# Altium PCB Sensor_Borad_V0.PcbDoc
Units mm, origin at the board's own origin, x right, y up, seen from the top; angles counter-clockwise.
Board outline 27 x 10.68 mm, 2 copper layers (Top Layer, Bottom Layer), stack 0.982 mm thick; 10 components, 7 nets, 40 pads, 15 vias.
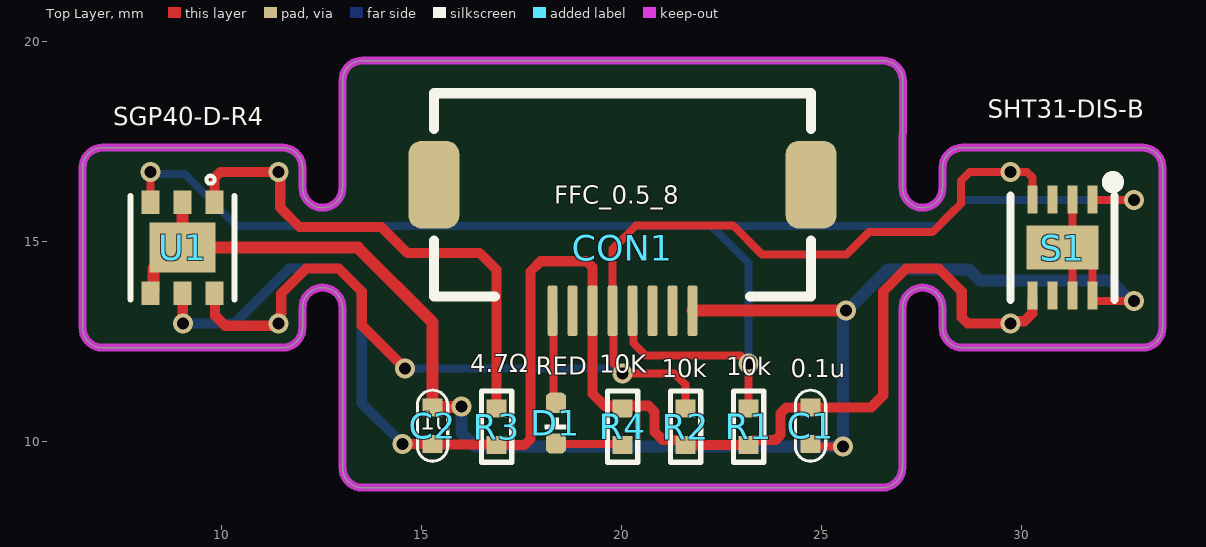
[diagram p0: Top Layer view]
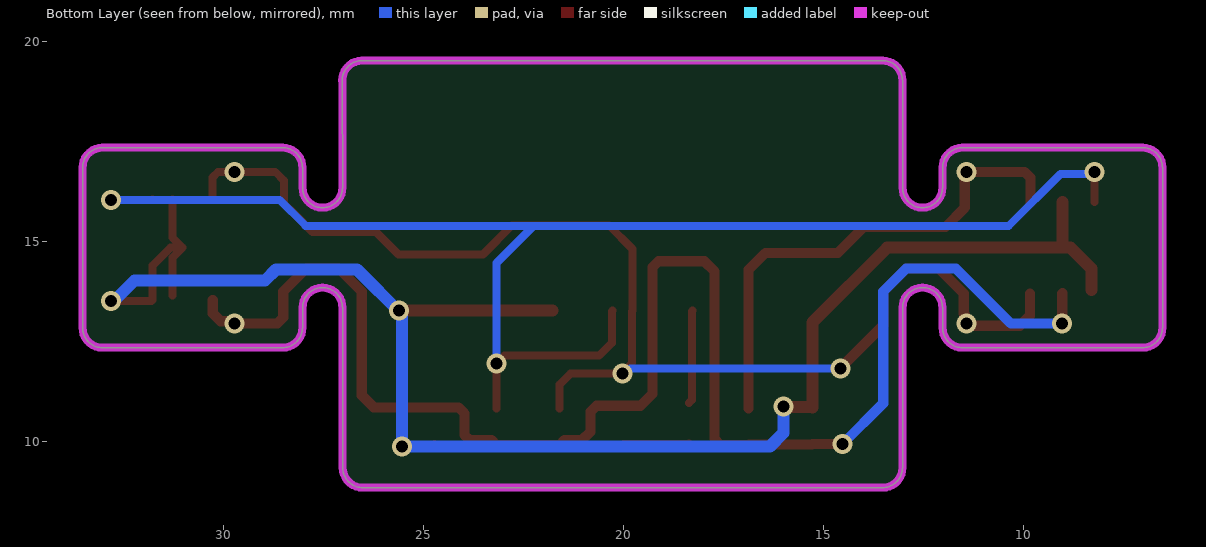
[diagram p1: Bottom Layer view, seen from below]
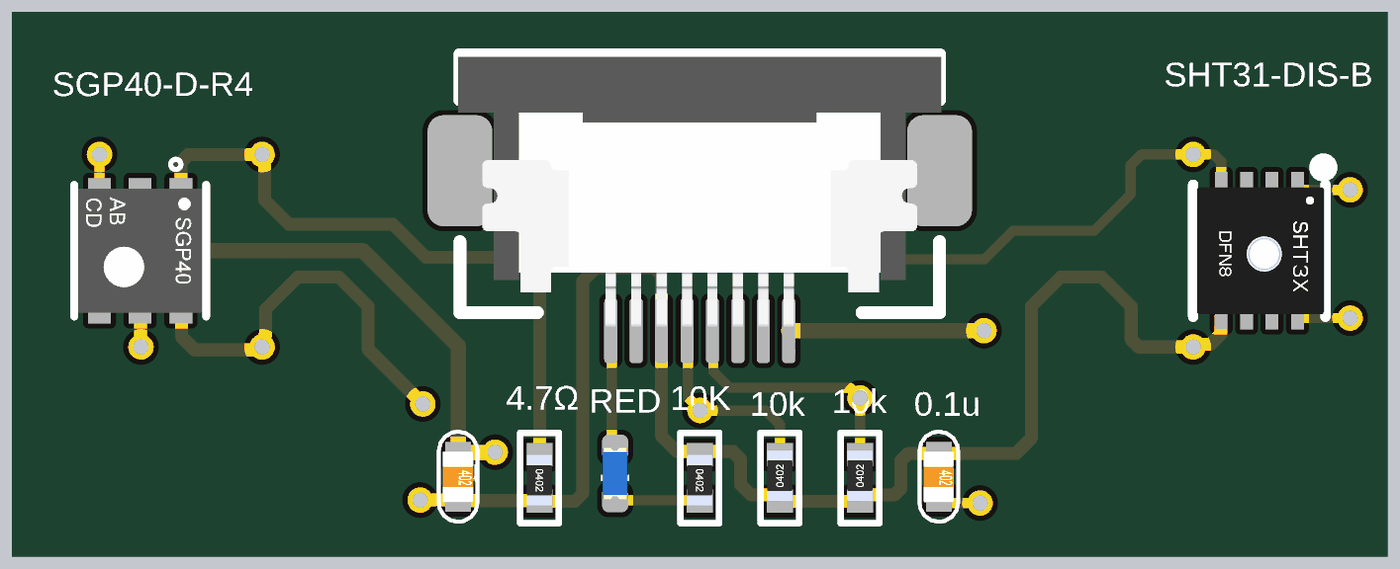
[diagram p2: 3D render of the assembled board from above, using the file's embedded part models]

## Layer stack, top to bottom
Top Solder: solder mask 0.0102, Solder Resist, Dk 3.5
Top Layer: signal copper 0.035
Dielectric 2: prepreg 0.0711, PP-006, Dk 4.1
Dielectric 1: dielectric 0.77, FR-4, Dk 4.8
Dielectric 3: prepreg 0.0711, PP-006, Dk 4.1
Bottom Layer: signal copper 0.035
Bottom Solder: solder mask 0.0102, Solder Resist, Dk 3.5

## Board outline
6.531,12.846 ccw(c7.031,12.846) 7.031,12.346 11.531,12.346 ccw(c11.531,12.846) 12.031,12.846 12.031,13.346 cw(c12.531,13.346) 12.531,13.846 cw(c12.531,13.346) 13.031,13.346 13.031,9.347 13.03,9.347 ccw(c13.53,9.347) 13.53,8.847 13.531,8.846 26.526,8.846 26.526,8.847 ccw(c26.526,9.347) 27.026,9.347 27.031,9.347 27.031,13.346 cw(c27.531,13.346) 27.531,13.846 cw(c27.531,13.346) 28.031,13.346 28.031,12.846 ccw(c28.531,12.846) 28.531,12.346 33.031,12.346 ccw(c33.031,12.846) 33.531,12.846 33.531,16.846 ccw(c33.031,16.846) 33.031,17.346 28.531,17.346 ccw(c28.531,16.846) 28.031,16.846 28.031,16.346 cw(c27.531,16.346) 27.531,15.846 cw(c27.531,16.346) 27.031,16.346 27.037,19.025 27.038,19.025 ccw(c26.538,19.025) 26.538,19.525 13.531,19.525 ccw(c13.531,19.025) 13.031,19.025 13.031,16.346 cw(c12.531,16.346) 12.531,15.846 cw(c12.531,16.346) 12.031,16.346 12.031,16.846 ccw(c11.531,16.846) 11.531,17.346 7.031,17.346 ccw(c7.031,16.846) 6.531,16.846

## Design rules (kind name [scope] priority, off if disabled: settings)
Clearance [All] p1: gap=0.152 ignorepadtopadclearanceinfootprint=FALSE
HoleToHoleClearance [All] p1: gap=0 allowstackedmicrovias=TRUE
MinimumSolderMaskSliver [All] p1: minsoldermaskwidth=0
PolygonConnect [All] p1: thpad.connectstyle=Direct thpad.reliefconductorwidth=0.254 thpad.reliefentries=4 thpad.polygonreliefangle="90 Angle" thpad.airgapwidth=0.254 smdpad.connectstyle=Relief smdpad.reliefconductorwidth=0.254 smdpad.reliefentries=4 smdpad.polygonreliefangle="90 Angle" smdpad.airgapwidth=0.254 via.connectstyle=Direct via.reliefconductorwidth=0.254 via.reliefentries=4 via.polygonreliefangle="90 Angle" via.airgapwidth=0.254
RoutingVias [All] p1: holewidth=0.711 width=1.27 viastyle="Through Hole" minholewidth=0.711 minwidth=1.27 maxholewidth=0.711 maxwidth=1.27
SilkToSilkClearance [All] p1: silktosilkclearance=0
SilkToSolderMaskClearance [IsPad] p1: minsilkscreentomaskgap=0 clearancetoexposedcopper=TRUE
SolderMaskExpansion [All] p1: expansion=0.102 istentingtop=FALSE
Width [All] p1: maxlimit=2.54 minlimit=0.152 preferedwidth=0.254
26 further rules are at their usual default settings.

## Components (designator, comment, footprint, x,y, rotation, side; value= is the part's Value field where it differs from the comment)
C1 "0.1u" 0402_C 24.731,10.396 r270 top
C2 "1u" 0402_C 15.281,10.396 r270 top
CON1 "FFC_0.5_8" FFC_0.5_8 20.031,14.846 r90 top locked
D1 "RED" LED_0402_BLUE 18.367,10.46 r90 top
R1 "10k" 0402_R 23.181,10.371 r90 top
R2 "10k" 0402_R 21.606,10.371 r90 top
R3 "4.7Ω" 0402_R 16.881,10.371 r270 top
R4 "10K" 0402_R 20.031,10.371 r270 top
S1 "SHT31-DIS-B" DFN8-P0.50 31.031,14.846 r180 top
U1 "SGP40-D-R4" DFN-6_L2.4-W2.4-P0.80-TL-EP 9.031,14.846 r270 top

## Footprints (in the part's own frame and the unit in brackets; to place one, negate y for a bottom-side part, rotate by r counter-clockwise, add the part's x,y. Pads: shape width x height; smd on the part's side, far side on the other; paste and mask are expansions set on the pad)
0402_C [mil]
  rect 18x20 smd: 1(-18,0) 2(18,0)
  silkscreen extent -35,-15 35,15, body extent -20,-12 20,12, height 8
0402_R [mil]
  rect 18x20 smd: 1(-18,0) 2(18,0)
  silkscreen extent -35,-15 35,15, body extent -18,-10 21,10, height 13
DFN8-P0.50 [mm]
  rect 0.25x0.7 smd: 1(-0.75,-1.2) 2(-0.25,-1.2) 3(0.25,-1.2) 4(0.75,-1.2) 5(0.75,1.2) 6(0.25,1.2) 7(-0.25,1.2) 8(-0.75,1.2)
  rect 1.8x1.1 smd: 9(0,0)
  silkscreen extent -1.39,-1.77 1.3,1.3, body extent -1.28,-1.25 1.23,1.25, height 0.9
DFN-6_L2.4-W2.4-P0.80-TL-EP [mm]
  rect 0.585x0.448 smd: 1(-1.137,0.8) 2(-1.137,0) 3(-1.137,-0.8) 4(1.137,-0.8) 5(1.137,0) 6(1.137,0.8)
  rect 1.25x1.65 smd: 7(0,0)
  silkscreen extent -1.8,-1.3 1.3,1.3, body extent -1.22,-1.22 1.22,1.22, height 0.85
FFC_0.5_8 [mil]
  rrect50% 86x50 smd: 0(62,185.63) 0(62,-185.63)
  rrect50% 50x10 smd: 1(-62,-68.9) 2(-62,-49.21) 3(-62,-29.53) 4(-62,-9.84) 5(-62,9.84) 6(-62,29.53) 7(-62,49.21) 8(-62,68.9)
  silkscreen extent -48,-186 152,186, body extent -60,-187 151,187, height 82
LED_0402_BLUE [mil]
  rrect50% 20x20 smd: 1(-20,0) 2(20,0)
  silkscreen extent -6,-10 6,10, body extent -20,-10 20,10, height 18

## Part data
CON1: "FFC", System=Connector
D1: library part LED0, "Typical INFRARED GaAs LED", LatestRevisionDate=08-Jul-2005, LatestRevisionNote="Mech Layer 1 removed.", PackageReference=LED-0, Published=8-Jun-2000, Publisher="Altium Limited"
R4: library part Res2, "Resistor", LatestRevisionDate=17-Jul-2002, LatestRevisionNote="Re-released for DXP Platform.", PackageReference=AXIAL-0.4, Published=8-Jun-2000, Publisher="Altium Limited"
S1: BOM_JLCPCB Part Class="Extended Part", BOM_Manufacturer=Sensirion, BOM_Manufacturer Part=SHT31-DIS-B, BOM_Supplier=LCSC, BOM_Supplier Part=C80862, spicePre=S, spiceSymbolName=SHT31-DIS-B
U1: BOM_JLCPCB Part Class="Extended Part", BOM_Manufacturer=null, BOM_Manufacturer Part=SGP40-D-R4, BOM_Supplier=LCSC, BOM_Supplier Part=C2874215, Contributor=LCSC, spicePre=U, spiceSymbolName=SGP40-D-R4
C1 C2: Contributor=LCEDA_Lib, nameAlias=Value(F), spicePre=C, spiceSymbolName=C_0402_US
R1 R2 R3: Contributor=LCEDA_Lib, nameAlias=Value(Ω), spicePre=R, spiceSymbolName=R_0402_EU

## Via types
v1: diameter 0.5, hole 0.3, Top Layer to Bottom Layer, 15 vias

## Nets (pads, with @x,y where several pads share a name; then routed paths per layer and width w, separated by ;. In a path a pad name is that pad's centre, name@x,y a point inside that pad or via, vN(x,y) a via of type N, cw(c..) or ccw(c..) an arc to the next point about the centre after c; other vN are vias at no path point)
GND: C1.2 C2.1 CON1.1 S1.2 S1.7 S1.8 S1.9 U1.2 U1.4 U1.7 | length 44.3
  Top Layer w0.2: C1.2 24.792,9.877 v1(25.542,9.877) ; S1.7 31.281,14.596 S1.9 ; S1.2 31.281,15.096 S1.9 ; v1(32.817,13.519) 31.806,13.519 31.781,13.544 S1.8 31.781,14.396 31.331,14.846 S1.9
  Top Layer w0.3: U1.4@8.306,13.784 8.306,14.321 8.831,14.846 U1.7 ; U1.2 U1.7 ; v1(16.009,10.879) 15.996,10.866 15.294,10.866 C2.1 15.281,12.978 13.413,14.846 U1.7 ; CON1.1 v1(25.618,13.271) v1@25.625,13.278
  Bottom Layer w0.3: v1(16.009,10.879) 16.009,10.213 16.345,9.877 v1(25.542,9.877) 25.542,13.173 26.669,14.3 28.693,14.3 28.964,14.029 32.225,14.029 32.735,13.519 v1(32.817,13.519)
LED: CON1.8 D1.2 | length 2.3
  Top Layer w0.2: CON1.8 18.3,13.252 18.3,11.035 D1.2
NetD1_1: D1.1 R4.2 | length 1.7
  Top Layer w0.2: D1.1 18.386,9.933 20.012,9.933 R4.2
NetR3_1: R3.1 U1.1 | length 12.7
  Top Layer w0.254: U1.1 9.831,16.593 9.979,16.742 v1(11.427,16.742) 11.474,16.695 11.474,15.848 11.956,15.365 14.002,15.365 14.652,14.715 16.459,14.715 16.881,14.293 R3.1
SCL: CON1.5 R2.2 S1.4 U1.6 | length 31.8
  Top Layer w0.2: R2.2 21.606,11.421 21.331,11.696 20.061,11.696 19.8,11.958 19.8,13.252 CON1.5 19.781,14.813 20.373,15.406 22.79,15.406 23.519,14.677 25.628,14.677 26.192,15.24 27.785,15.24 28.219,15.674 28.499,15.953 28.499,16.526 28.715,16.742 v1(29.732,16.742) 30.138,16.742 30.281,16.6 S1.4
  Top Layer w0.254: U1.6@9.846,13.693 9.846,13.145 10.098,12.893 11.303,12.893 11.36,12.95 v1(11.427,12.95) 11.474,12.997 11.474,13.171 11.5,13.197 11.5,13.702 12.124,14.327 12.937,14.327 13.512,13.753 13.512,12.903 v1(14.586,11.828)
  Bottom Layer w0.2: v1(14.586,11.828) 19.828,11.828 19.955,11.702 v1(20.036,11.702)
SDA: CON1.4 R1.2 S1.1 U1.3 | length 36
  Top Layer w0.2: U1.3 v1(8.231,16.742) ; CON1.4 20.3,13.252 20.3,12.463 20.613,12.15 22.977,12.15 v1(23.181,11.946) R1.2 ; S1.1 S1.1 v1(32.817,16.045)
  Bottom Layer w0.2: v1(8.231,16.742) 8.288,16.685 9.085,16.685 10.363,15.406 ; 10.377,15.392 27.951,15.392 28.603,16.045 v1(32.817,16.045) ; 22.269,15.372 23.181,14.46 v1(23.181,11.946)
VCC_3.3V: C1.1 C2.2 CON1.6 R1.1 R2.1 R3.2 R4.1 S1.5 U1.5 | length 39.5
  Top Layer w0.254: U1.5 9.038,13.702 9.038,12.957 v1(9.045,12.95) ; v1(14.533,9.936) 14.535,9.938 15.279,9.938 C2.2 15.293,9.926 16.868,9.926 R3.2 17.58,9.914 17.729,10.062 17.729,14.249 17.988,14.508 19.132,14.508 19.281,14.359 19.281,11.196 19.583,10.894 20.682,10.894 20.831,10.745 20.831,10.246 21.035,10.042 21.477,10.042 R2.1 R1.1 23.31,10.042 23.864,10.042 23.981,10.159 23.981,10.705 24.129,10.853 C1.1 26.249,10.853 26.55,11.154 26.55,13.753 27.124,14.327 27.937,14.327 28.512,13.753 28.512,13.099 28.66,12.95 v1(29.732,12.95) ; v1@29.72,12.962 29.765,13.008 30.077,13.008 30.274,13.204 S1.5@30.274,13.531
  Bottom Layer w0.254: v1(9.045,12.95) 10.322,12.95 11.699,14.327 12.937,14.327 13.512,13.753 13.512,10.958 v1(14.533,9.936)
pads on no net: CON1.0 CON1.2 CON1.3 CON1.7 S1.3 S1.6

## Keep-outs
Keep-Out Layer:
  lines w0.2: 13.53,8.847 cw(c13.53,9.347) 13.03,9.347 13.031,13.346 ccw(c12.531,13.346) 12.531,13.846 ccw(c12.531,13.346) 12.031,13.346 12.031,12.846 cw(c11.531,12.846) 11.531,12.346 7.031,12.346 cw(c7.031,12.846) 6.531,12.846 6.531,14.846 6.531,16.846 cw(c7.031,16.846) 7.031,17.346 11.531,17.346 cw(c11.531,16.846) 12.031,16.846 12.031,16.346 ccw(c12.531,16.346) 12.531,15.846 ccw(c12.531,16.346) 13.031,16.346 13.031,19.025 cw(c13.531,19.025) 13.531,19.525 26.538,19.525 cw(c26.538,19.025) 27.038,19.025 ; 13.531,8.846 26.526,8.846 ccw(c26.526,9.347) 27.026,9.347 ; 27.031,9.347 27.031,13.346 cw(c27.531,13.346) 27.531,13.846 cw(c27.531,13.346) 28.031,13.346 28.031,12.846 ccw(c28.531,12.846) 28.531,12.346 33.031,12.346 ccw(c33.031,12.846) 33.531,12.846 33.531,14.846 33.531,16.846 ccw(c33.031,16.846) 33.031,17.346 28.531,17.346 ccw(c28.531,16.846) 28.031,16.846 28.031,16.346 cw(c27.531,16.346) 27.531,15.846 cw(c27.531,16.346) 27.031,16.346 27.037,19.025